# Altium PCB Mopq.PcbDoc (part 2 of 2)
Units mil, origin at the board's own origin, x right, y up, seen from the top; angles counter-clockwise.
Board outline 3099.85 x 1000 mil, 4 copper layers (TOP, SIG, VSS, BOT), stack 31.6 mil thick; 76 components, 92 nets, 477 pads, 380 vias.
Unrouted connection lines stored in the file: 14.
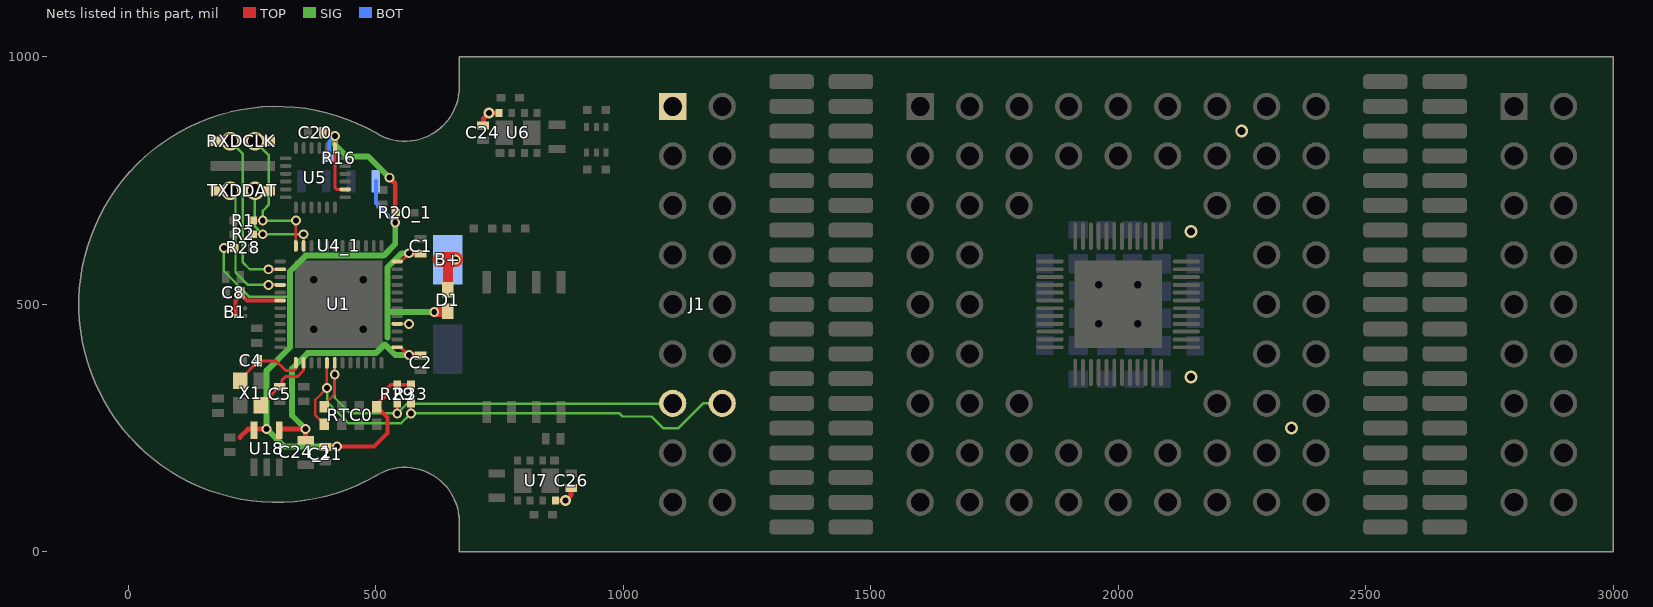
[diagram p4: the nets of this part, all layers, seen from the top]

## Via types
v1: diameter 22, hole 12, TOP to BOT, tented both sides, 144 vias
v2: diameter 20, hole 12, TOP to BOT, 130 vias
v3: diameter 38, hole 28, TOP to BOT, 82 vias
v4: diameter 26, hole 16, TOP to BOT, tented both sides, 16 vias
v5: diameter 22, hole 12, TOP to BOT, 7 vias
v6: diameter 80, hole 65, TOP to BOT, 1 vias

## Nets (pads, with @x,y where several pads share a name; then routed paths per layer and width w, separated by ;. In a path a pad name is that pad's centre, name@x,y a point inside that pad or via, vN(x,y) a via of type N, cw(c..) or ccw(c..) an arc to the next point about the centre after c; other vN are vias at no path point) (continued)
RTC_SCL: J1.13 R29.1 RTC0.8 U1.42 | length 869.7
  TOP w5: RTC0.8@395.67,293.31 395.67,297.24 417.07,318.65 417.07,358.22 v2(417.13,358.27) U1.42@417.13,381.89 ; v2(543.31,279.53) R29.1@543.31,300.2
  SIG w5: v2(417.13,358.27) 417.13,311.22 448.82,279.53 v2(543.31,279.53) 562.99,299.21 1099.21,299.21 J1.13@1100,300
RTC_SDA: J1.14 R33.1 RTC0.1 U1.41 | length 1073.6
  TOP w5: RTC0.1@393.7,255.91 RTC0.1@395.67,257.87 ; U1.41@401.38,381.89 401.38,330.71 377.95,307.28 377.95,275.59 RTC0.1@395.67,257.87 ; RTC0.1@401.57,251.97 RTC0.1@395.67,257.87 ; R33.1@570.87,295.28 v2(570.87,279.53) R33.1@570.87,300.2
  SIG w5: v2(401.57,330.71) 401.57,303.15 444.88,259.84 551.18,259.84 v2(570.87,279.53) 992.13,279.53 998.19,273.46 1057.24,273.46 1080.71,250 1111.42,250 1161.42,300 J1.14@1200,300
RXD: RXD.1 U1.26 | length 336.6
  TOP w5: v2(283.27,570.87) U1.26@306.89,570.87
  SIG w5: v3(205.91,829.53) 231.3,804.13 231.3,584.88 245.32,570.87 v2(283.27,570.87)
  other v2: 283.27,570.87
SCL: 
SCLK: 
STATUS0: 
STATUS1: 
STATUS2: 
SWDCLK: CLK.1 R1.1 U1.24 | length 329.3
  TOP w5: R1.1@250.98,669.29 v2(271.65,669.29) ; U1.24@338.39,618.11 v2(338.39,669.29)
  SIG w5: v3(255.91,829.53) 283.46,801.97 283.46,700.79 271.65,688.98 v2(271.65,669.29) v2(338.39,669.29) ; 271.18,730 281.18,720
SWDIO: DAT.1 R2.1 U1.23 | length 221.1
  TOP w5: R2.1@250.98,641.73 v2(271.65,641.73) ; U1.23@354.13,618.11 v2(354.13,641.73)
  SIG w5: v3(255.91,729.53) 255.91,657.48 v2(271.65,641.73) v2(354.13,641.73)
TERM: 
TXD: TXD.1 U1.28 | length 311.6
  TOP w5: v2(283.27,539.37) U1.28@306.89,539.37
  SIG w5: v3(205.91,729.53) 216.54,718.9 216.54,564.65 241.81,539.37 ; 241.81,539.37 v2(283.27,539.37) 241.81,539.37
  other v2: 283.27,539.37
VDD_EN: 
VDD_PA: B1.A2 C8.2 U1.30 | length 130.3
  TOP w5.91: C8.2@226.3,517.83 C8.2@230,517.83
  TOP w8: B1.A2@216.34,476.38 216.34,507.87 C8.2@226.3,517.83 ; C8.2@230,517.83 239.96,507.87 291.14,507.87 U1.30@306.89,507.87
VIBE_EN: U1.4 | length 23.6
  TOP w5: U1.4@543.11,460.63 v2(566.73,460.63)
VIMU: C20.2 C21.2 R16.2 R20_1.1 R28.2 R29.2 R33.2 RTC0.5 U4_1.8 U5.8 U5.13 U18.5 | length 1890.5
  TOP w5: v2(192.91,614.17) R28.2@213.58,614.17
  TOP w6: C20.2@392.72,850.38 406.99,850.38 v2(417.32,840.05) U5.13@417.32,815.94 417.32,736.22 421.26,732.28 U5.8@437.99,732.28
  TOP w8: v2(421.26,212.6) 496.06,212.6 523.62,240.16 523.62,271.65 RTC0.5@505.91,289.37 ; RTC0.5@505.91,301.18 523.62,318.9 523.62,330.71 530.51,337.6 R33.2@570.87,337.6
  TOP w10: 225.39,231.3 242.13,248.03 v2(279.53,248.03) ; C21.2@400.59,212.6 v2(421.26,212.6) ; v2(527.56,755.91) 539.37,744.09 v2(539.37,665.35)
  SIG w5: v2(192.91,614.17) 192.91,566.93 244.09,515.75 326.77,515.75
  SIG w12: v2(417.32,840.05) 417.32,822.83 440.94,799.21 484.25,799.21 v2(527.56,755.91) ; v2(421.26,212.6) 314.96,212.6 v2(279.53,248.03) 279.53,366.14 326.77,413.39 326.77,566.93 358.27,598.43 515.75,598.43 539.37,622.05 v2(539.37,665.35)
  BOT w8: R16.2@406.5,795.28 406.5,829.22 v2(417.32,840.05) ; U4_1.8@500,749.02 500,704.72 v2(539.37,665.35)
VMCU: C1.2 C2.2 C24_1.2 C26.2 D1.2 J1.1 U1.1 U1.12 U7.8 U18.4 | length 944.2
  TOP w5: U1.1@543.11,413.39 U1.1@550,413.39 ; U1.12@543.11,586.61 U1.12@550.98,586.61
  TOP w6: U1.1@550,413.39 v2@566.73,396.65 ; U1.12@550.98,586.61 v2@566.73,602.36
  TOP w8: v2@566.73,602.36 C1.2@590.35,602.36
  TOP w10: U18.4@305.12,248.03 v2(358.27,248.03) C24_1.2@358.27,225.39 ; v2(566.73,397.64) C2.2@590.35,397.64 ; U7.8@862.95,103.54 v5(883.23,103.54) 894.65,114.96 C26.2@894.65,129.21
  TOP w20: v2(618.11,484.25) D1.2@645.67,484.25
  SIG w12: v2(358.27,248.03) 330.71,275.59 330.71,370.08 362.2,401.57 500.2,401.57 517.82,419.19 539.37,397.64 v2(566.73,397.64) ; 523.62,432.87 523.62,574.8 552.17,603.35 v2(566.73,603.35) ; 531.5,484.25 v2(618.11,484.25)
  other v4: 2147.05,647.24 2249.61,850
VSYS: B+.1 C24.2 D1.1 U6.8 | length 143.2
  TOP w10: C24.2@717.32,861.14 717.32,875.39 v5(728.74,886.81) U6.8@749.02,886.81
  TOP w20: D1.1@645.67,529.53 645.67,590.55
  TOP w30: v2(629.92,590.55) v2(661.42,590.55)
  other v4: 2350,250.39 2147.05,352.95
XC1: C4.2 U1.37 X1.1 | length 153.2
  TOP w5: X1.1@226.42,345.47 X1.1@226.42,349.41 ; C4.2@261.85,384.84 C4.2@261.85,385.83
  TOP w6: X1.1@226.42,349.41 C4.2@261.85,384.84 ; C4.2@261.85,385.83 298.27,385.83 317.95,366.14 334.45,366.14 338.39,370.08 U1.37@338.39,381.89
XC2: C5.2 U1.38 X1.3 | length 136.9
  TOP w6: X1.3@267.76,296.26 301.22,329.72 C5.2@301.22,333.66 ; C5.2@305.16,333.66 310.08,333.66 310.08,346.46 317.95,354.33 342.32,354.33 354.13,366.14 U1.38@354.13,381.89
pads on no net: J3.1 J3.2 J3.3 J3.4 J3.5 J3.6 J3.7 J3.8 J3.9 J3.10 J3.11 J3.12 J3.13 J3.14 J3.15 J3.16 J3.17 J3.18 P1.1 P1.2 P1.3 P1.4 P1.5 P1.6 P1.7 P1.8 P1.9 P1.10 P1.11 P1.12 P1.13 P1.14 P1.15 P1.16 P1.17 P1.18 P1.19 P1.20 P2.1 P2.2 P2.3 P2.4 P2.5 P2.6 P2.7 P2.8 P2.9 P2.10 P2.11 P2.12 P2.13 P2.14 P2.15 P2.16 P2.17 P2.18 P2.19 P2.20 P3.1 P3.2 P3.3 P3.4 P3.5 P3.6 P3.7 P3.8 P3.9 P3.10 P3.11 P3.12 P3.13 P3.14 P3.15 P3.16 P3.17 P3.18 P3.19 P3.20 P4.1 P4.2 P4.3 P4.4 P4.5 P4.6 P4.7 P4.8 P4.9 P4.10 P4.11 P4.12 P4.13 P4.14 P4.15 P4.16 P4.17 P4.18 P4.19 P4.20 RTC0.4 RTC0.7 U5.1 U5.2 U5.3 U5.4 U5.5 U5.6 U5.14 U5.15 U5.16 U5.17 U5.19 U6.3 U6.7 U7.3 U7.7 U10.A1 U10.A3 U10.A4 U10.A5 U10.A6 U10.A7 U10.A9 U10.B2 U10.B3 U10.B4 U10.B5 U10.B6 U10.B7 U10.B8 U10.C1 U10.C2 U10.C3 U10.C7 U10.C8 U10.C9 U10.D1 U10.D2 U10.D8 U10.D9 U10.E1 U10.E2 U10.E8 U10.E9 U10.F1 U10.F2 U10.F8 U10.F9 U10.G1 U10.G2 U10.G3 U10.G7 U10.G8 U10.G9 U10.H2 U10.H3 U10.H4 U10.H5 U10.H6 U10.H7 U10.H8 U10.J1 U10.J3 U10.J4 U10.J5 U10.J6 U10.J7 U10.J9 U11.1 U11.2 U11.3 U11.4 U11.5 U11.6 U11.7 U11.8 U11.9 U11.10 U11.11 U11.12 U11.13 U11.14 U11.15 U11.16 U11.17 U11.18 U11.19 U11.20 U11.21 U11.22 U11.23 U11.24 U11.25 U11.26 U11.27 U11.28 U11.29 U11.30 U11.31 U11.32 U11.33 U11.34 U11.35 U11.36 U11.37 U11.38 U11.39 U11.40 U11.41 U11.42 U11.43 U11.44 U11.45 U11.46 U11.47 U11.48 U18.3 X1.2 X1.4 Z1.1 Z1.2 Z2.1 Z2.2 Z3.1 Z3.2 Z4.1 Z4.2 Z5.1 Z5.2 Z6.1 Z6.2 Z7.1 Z7.2 Z8.1 Z8.2 Z9.1 Z9.2 Z10.1 Z10.2 Z11.1 Z11.2 Z12.1 Z12.2 Z13.1 Z13.2 Z14.1 Z14.2 Z15.1 Z15.2 Z16.1 Z16.2
copper on no net: | length 14928.8
  TOP w6: 1743.7,423.82 v1(1790.95,423.82) ; 1743.7,463.19 v1(1790.95,463.19) ; 1743.7,537.99 v1(1790.95,537.99) ; 1747.64,577.36 v1(1790.95,577.36) ; v1(1755.51,404.13) 1797,404.13 1801.7,408.83 1822,429.13 1862.2,429.13 ; v1(1755.51,443.5) 1800.59,443.5 1817.72,460.63 1862.2,460.63 ; v1@1755.46,556.5 1800.79,556.5 1817.91,539.37 1862.2,539.37 ; v1@1755.46,595.87 1797.9,595.87 1822.9,570.87 1862.2,570.87 ; v1(1755.51,482.87) 1788.78,482.87 1798.03,492.13 1862.2,492.13 ; v1(1755.51,518.31) 1789.76,518.31 1800.2,507.87 1862.2,507.87 ; v1(1790.95,384.45) 1794.69,384.45 1823.62,413.39 1862.2,413.39 ; v1(1790.95,423.82) 1798.62,423.82 1819.69,444.88 1862.2,444.88 ; v1(1790.95,463.19) 1804.09,476.38 1862.2,476.38 ; v1@1790.9,536.81 1804.09,523.62 1862.2,523.62 ; v1@1790.9,576.18 1797.83,576.18 1818.9,555.12 1862.2,555.12 ; v1@1790.9,615.55 1794.88,615.55 1823.82,586.61 1862.2,586.61 ; v1@1884.45,290.95 1884.45,294.09 1913.39,323.03 1913.39,362.2 ; v1(1884.45,709.06) 1884.45,705.12 1913.39,676.18 1913.39,637.8 ; v1@1904.13,255.51 1904.13,297.9 1929.13,322.9 1929.13,362.2 ; v1(1904.13,744.49) 1904.13,703 1908.83,698.3 1929.13,678 1929.13,637.8 ; 1923.03,246.26 v1@1923.03,291.53 ; v1@1923.82,290.95 1923.82,298.03 1944.88,319.09 1944.88,362.2 ; 1923.82,756.3 1923.82,702.17 1944.88,681.1 1944.88,637.8 ; v1@1943.5,255.51 1943.5,300 1960.63,317.13 1960.63,362.2 ; v1(1943.5,744.49) 1943.5,699.21 1960.63,682.09 1960.63,637.8 ; 1962.01,245.67 v1(1962.01,290.95) ; v1@1963.19,290.95 1976.38,304.13 1976.38,362.2 ; v1(1963.19,709.06) 1963.19,756.3 ; v1(1963.19,709.06) 1976.38,695.91 1976.38,637.8 ; v1(1981.69,255.51) 1981.69,289.96 1992.13,300.39 1992.13,362.2 ; v1(1982.87,744.49) 1982.87,711.02 1992.13,701.77 1992.13,637.8 ; 2007.87,362.2 2007.87,299.21 2017.13,289.96 v1(2017.13,255.51) ; 2007.87,637.8 2007.87,700.98 2018.31,711.42 v1(2018.31,744.49) ; 2023.62,362.2 2023.62,304.13 v1(2036.81,290.95) 2036.81,245.67 ; 2023.62,637.8 2023.62,695.91 v1@2036.81,709.1 ; v1(2037.99,709.06) 2037.99,756.3 ; 2039.37,362.2 2039.37,317.91 2056.5,300.79 v1(2056.5,255.51) ; 2039.37,637.8 2039.37,682.28 2056.5,699.41 v1@2056.5,744.54 ; 2055.12,362.2 2055.12,319.88 2076.18,298.82 v1(2076.18,290.95) 2076.18,245.67 ; 2055.12,637.8 2055.12,681.3 2076.18,702.36 v1@2076.18,709.1 ; 2070.87,362.2 2070.87,322.05 2091.17,301.75 2095.87,297.05 v1(2095.87,255.51) ; 2070.87,637.8 2070.87,677.1 2095.87,702.11 v1@2095.87,744.54 ; v1(2077.36,709.06) 2077.36,752.36 ; 2086.61,362.2 2086.61,323.82 2115.55,294.88 v1(2115.55,290.95) ; 2086.61,637.8 2086.61,676.38 2115.55,705.32 v1@2115.55,709.1 ; 2137.8,413.39 2177.17,413.39 2206.1,384.45 v1@2209.1,384.45 ; 2137.8,429.13 2177.1,429.13 2202.1,404.13 v1@2244.54,404.13 ; 2137.8,444.88 2181.1,444.88 2202.17,423.82 v1@2209.1,423.82 ; 2137.8,460.63 2182.09,460.63 2199.21,443.5 v1@2244.54,443.5 ; 2137.8,476.38 2195.91,476.38 v1@2209.1,463.19 ; 2137.8,492.13 2200.79,492.13 2211.22,481.69 v1(2244.49,481.69) ; 2137.8,507.87 2202.56,507.87 2211.81,517.13 v1(2244.49,517.13) ; 2137.8,523.62 2195.87,523.62 v1(2209.06,536.81) 2253.09,536.81 ; 2137.8,539.37 2182.87,539.37 2200,556.5 v1(2244.49,556.5) ; 2137.8,555.12 2180.91,555.12 2201.97,576.18 v1(2209.06,576.18) 2253.09,576.18 ; 2137.8,570.87 2177.95,570.87 2198.26,591.17 2202.95,595.87 v1(2244.49,595.87) ; 2137.8,586.61 2175.98,586.61 2204.92,615.55 v1(2209.06,615.55) ; v1(2209.06,422.64) 2252.36,422.64 ; v1(2209.06,462.01) 2256.3,462.01
  TOP w8: 1600,400 1600,401.73 ; 1600,598.28 1600,600 ; 1900,100 1901.73,100 ; 1900,900 1901.73,900 ; 2098.28,100 2100,100 ; 2098.28,900 2100,900 ; 2400,400 2400,401.73 ; 2400,598.28 2400,600
  TOP w10: 1600,100 1648.91,148.91 1648.91,227.63 1671.91,250.63 1717.91,250.63 1755.51,288.24 1755.51,349.02 v1(1790.95,384.45) ; 1600,300 1650.91,350.91 1650.91,417.63 1676.78,443.5 v1(1755.51,443.5) ; 1600,401.73 1656.91,458.63 1723.39,458.63 1727.95,463.19 1743.7,463.19 ; 1600,598.28 1656.91,541.37 1720.64,541.37 1724.02,537.99 1743.7,537.99 ; 1600,700 1650.91,649.1 1650.91,582.37 1675.6,557.68 v1(1755.51,557.68) ; 1600,900 1648.91,851.1 1727.63,851.1 1750.63,828.1 1750.63,782.1 1787.06,745.67 1847.84,745.67 v1(1884.45,709.06) ; 1700,200 1754.53,254.53 1846.85,254.53 v1(1883.27,290.95) ; 1700,300 1739.76,339.76 1739.76,388.39 v1(1755.51,404.13) ; 1700,400 1723.82,423.82 1743.7,423.82 ; 1700,500 1738.39,500 v1(1755.51,482.87) ; 1700,600 1702.17,600 1724.8,577.36 1746.91,577.36 ; 1700,700 1737.5,662.5 1737.5,615.06 v1(1755.51,597.05) ; 1700,800 1753.54,746.46 1753.54,654.13 v1(1790.95,616.73) ; 1800,100 1850.91,150.91 1917.63,150.91 1942.32,175.6 v1@1942.32,258.3 ; 1800,200 1838.78,238.78 1886.22,238.78 v1(1902.95,255.51) ; 1800,800 1837.5,762.5 1886.12,762.5 v1(1904.13,744.49) ; 1800,900 1850.91,849.1 1917.63,849.1 1943.63,823.1 v1@1943.63,743.58 ; 1900,200 1900,202.36 1922.64,225 1922.64,245.5 ; 1900,800 1900,799.8 1923.82,775.99 1923.82,753.09 ; 1901.73,100 1959.49,157.76 1959.49,224.45 1962.01,226.97 1962.01,245.67 ; 1901.73,900 1958.63,843.1 1958.63,780.54 1963.19,775.99 1963.19,756.3 ; v1(1982.87,744.49) 2000,761.62 2000,800 ; 2000,229.92 2000,238.39 v1(2017.13,255.51) ; 2036.81,246.91 2036.81,219.72 2039.76,216.76 2039.76,158.51 2098.28,100 ; 2037.99,753.09 2037.99,769.93 2042.72,774.65 2042.72,844.44 2098.28,900 ; v1(2056.5,255.51) 2056.5,176.78 2082.37,150.91 2149.1,150.91 2200,100 ; v1(2057.68,744.49) v1(2057.68,744.49) 2057.72,824.44 2058.66,825.39 ; v1@2058.66,742.72 2058.66,825.39 ; 2076.18,245.67 2076.18,224.02 2100,200.2 2100,200 ; 2077.36,753.09 2077.36,775.39 2100,798.03 2100,800 ; v1(2095.87,255.51) 2112.6,238.78 2161.22,238.78 2200,200 ; v1(2097.05,744.49) 2115.06,762.5 2162.5,762.5 2200,800 ; v1(2115.55,290.95) 2150.98,255.51 2211.76,255.51 2249.37,217.91 2249.37,171.91 2272.37,148.91 2351.1,148.91 2400,100 ; v1(2116.73,709.06) 2153.35,745.67 2245.67,745.67 2300,800 ; 2200,900 2149.1,849.1 2082.37,849.1 2058.66,825.39 ; v1(2209.06,383.27) 2243.7,348.62 2243.7,256.3 2300,200 ; v1(2209.06,615.55) 2211.02,615.55 2243.7,648.23 2243.7,707.28 2285.79,749.37 2325.16,749.37 2351.1,775.31 2351.1,851.1 2400,900 ; v1@2243.7,443.5 2323.22,443.5 2349.1,417.63 2349.1,350.91 2400,300 ; v1@2243.7,557.68 2324.4,557.68 2349.1,582.37 2349.1,649.1 2400,700 ; v1(2244.49,402.95) 2262.11,385.34 2262.5,385.34 2262.5,337.5 2300,300 ; v1(2244.49,517.13) 2261.62,500 2300,500 ; v1(2244.49,595.87) 2244.49,596.06 2260.24,611.81 2260.24,660.24 2300,700 ; 2253.09,536.81 2266.14,536.81 2270.7,541.37 2343.1,541.37 2400,598.28 ; 2253.09,576.18 2275.79,576.18 2299.61,600 2300,600 ; 2254.5,422.64 2275.2,422.64 2297.84,400 2300,400 ; 2256.3,462.01 2268.5,462.01 2271.88,458.63 2343.1,458.63 2400,401.73
  SIG w10: 1600,500 1651.77,551.77 1722.05,551.77 v1(1755.51,518.31) ; v1@1981.3,255.91 v1@1983.86,258.47 ; v1(1981.69,255.51) 1949.21,223.03 1949.21,150.79 1992.86,107.14 ; 1992.86,907.14 2050.59,849.41 2050.59,776.77 v1(2018.31,744.49) ; v1@2019.29,742.72 v1@2019.69,743.11 ; v1@2243.7,482.87 v1@2244.69,481.89 ; v1(2244.49,481.69) 2277.76,448.43 2348.43,448.43 2400,500
  BOT w8: 1917.06,473.36 1949.14,473.36 1961.87,460.63 ; 1918.06,527.17 1949.67,527.17 1961.87,539.37 ; 1918.54,582.17 1961.34,539.37 1961.87,539.37 ; 1919.07,417.3 1961.87,460.1 1961.87,460.63 ; 1974.07,416.83 1974.07,448.43 1961.87,460.63 ; 1974.6,584.18 1974.6,552.1 1961.87,539.37 ; 2027.88,415.82 2027.88,447.9 2040.61,460.63 ; 2028.41,583.18 2028.41,551.57 2040.61,539.37 ; 2083.41,582.71 2040.61,539.91 2040.61,539.37 ; 2083.94,417.83 2041.14,460.63 2040.61,460.63 ; 2084.42,472.83 2052.81,472.83 2040.61,460.63 ; 2085.42,526.64 2053.34,526.64 2040.61,539.37
  BOT w12: 1851.61,582.17 1851.77,582.34 1851.77,647.24 1916.2,647.24 1919.6,650.64 ; 1853.74,417.86 1853.74,352.95 1918.17,352.95 ; 2082.62,352.95 2147.05,352.95 2147.05,417.86 ; 2082.62,647.24 2147.05,647.24 2147.05,582.34
  other v1: 1942.32,255.51 1922.64,290.95 2244.49,442.32 1923.82,709.06
  other v3: 1425,50 2575,50 1375,100 1425,100 2575,100 2625,100 1375,150 1425,150 2575,150 2625,150 1425,200 2575,200 1375,250 1425,250 2575,250 2625,250 1375,300 1425,300 2575,300 2625,300 1425,350 2575,350 1375,400 1425,400 2575,400 2625,400 1375,450 1425,450 2575,450 2625,450 1425,500 2575,500 1375,550 1425,550 2575,550 2625,550 1375,600 1425,600 2575,600 2625,600 1425,650 2575,650 1375,700 1425,700 2575,700 2625,700 1375,750 1425,750 2575,750 2625,750 1425,800 2575,800 1375,850 1425,850 2575,850 2625,850 1375,900 1425,900 2575,900 2625,900 1425,950 2575,950
  other v4: 2145.08,317.52 2181.5,353.94

## Polygon pours and split planes (outlines as drawn)
no net on BOT "Bottom-Power" (solid, shelved, pour order 7): 2649.04,4000 1425.96,4000 1375,3950 1375,2700 1425.96,2650 2649.04,2650 2700,2700 2700,3950 2649.04,4000
no net on TOP "Top-Shield" (solid, shelved, pour order 12): 0,3950 0,50 50,0 2650,0 2700,50 2700,3950 2650,4000 50,4000 0,3950
VMCU on SIG "Bottom-GND" (solid, pour order 17): 2000.6,949.16 1999.12,947.68 1999.12,499.76 2449.19,499.76 2450.2,498.75 2450.4,498.95 2450.4,949.34 2000.78,949.34 2000.6,949.16
1V8 on SIG "Bottom-GND" (solid, pour order 12): 1551.63,949.21 1550.45,948.03 1550.45,499.4 2004.42,499.4 2004.78,499.04 2000.84,502.98 2000.84,948.8 1552.04,948.8 1551.63,949.21
3V3 on SIG "Bottom-GND" (solid, pour order 15): 1550,500 1551.18,498.82 1551.18,49.8 1999.8,49.8 2000,50 1998.91,51.09 1998.91,499.61 1550,499.61
VSYS on SIG "Bottom-GND" (solid, pour order 16): 1997.63,49.8 1998.25,49.18 2450.2,49.18 2450.2,498.39 2450,498.59 2448.98,499.61 1998.91,499.61 1998.91,50.49 1998.43,50
GND on SIG "Top-Shield" (solid, pour order 4): 135,270 145,260 190,260 230,300 230,395 280,440 305,440 315,450 315,495 305,505 240,505 180,565 115,565 105,555 105,480 115,395 135,330
VMCU on SIG "Top-Shield" (solid, pour order 6): 340.2,410 365.2,385 515.2,385 540.2,410 540.2,565 515.2,590 370.2,590 340.2,560
GND on VSS (split plane): 156 vertices, not listed, extent 100,20.1 2979.9,979.9

## Other copper
TOP:
  text "1" at 3100,50 h60 r90
  text "1" at 2716.54,18.58 h60 r90
SIG:
  text "2" at 3100,125 h60 r90
BOT:
  text "4" at 3100,325 h60 r90
VSS (plane layer: these items are gaps in the copper):
  region: 3125,293.7 3125,400 2995,400 2995,293.7
  region: 3130,25 3130,200 3000,200 3000,25
  lines w40: -60,330 -60,670 ; -25,275 -25,730 ; 10,230 10,770 ; 45,195 45,805 ; 78.9,580 78.9,829.58 ; 80,169.62 80,425 ; 111.36,151.77 111.36,322.15 cw(c600,500) 111.36,677.85 111.36,848.23
  text "3" at 3100,225 h60 r90

## Silkscreen, mask and mechanical layers (free items; w line width, h text height)
Top Solder:
  circle w8: c1884.45,709.06 r4
  circle w8: c1904.13,744.49 r4
  circle w8: c1923.82,709.06 r4
  circle w8: c1943.5,744.49 r4
  circle w8: c1963.19,709.06 r4
  circle w8: c1982.87,744.49 r4
  circle w8: c2018.31,744.49 r4
  circle w8: c2037.99,709.06 r4
  circle w8: c2057.68,744.49 r4
  circle w8: c2077.36,709.06 r4
  circle w8: c2097.05,744.49 r4
  circle w8: c2116.73,709.06 r4
  circle w8: c2209.06,615.55 r4
  circle w8: c2244.49,595.87 r4
  circle w8: c2209.06,576.18 r4
  circle w8: c2244.49,556.5 r4
  circle w8: c2209.06,536.81 r4
  circle w8: c2244.49,517.13 r4
  circle w8: c2244.49,481.69 r4
  circle w8: c2209.06,462.01 r4
  circle w8: c2244.49,442.32 r4
  circle w8: c2209.06,422.64 r4
  circle w8: c2244.49,402.95 r4
  circle w8: c2209.06,383.27 r4
  circle w8: c2115.55,290.95 r4
  circle w8: c2095.87,255.51 r4
  circle w8: c2076.18,290.95 r4
  circle w8: c2056.5,255.51 r4
  circle w8: c2036.81,290.95 r4
  circle w8: c2017.13,255.51 r4
  circle w8: c1981.69,255.51 r4
  circle w8: c1962.01,290.95 r4
  circle w8: c1942.32,255.51 r4
  circle w8: c1922.64,290.95 r4
  circle w8: c1902.95,255.51 r4
  circle w8: c1883.27,290.95 r4
  circle w10: c2048.62,949.47 r6
  circle w10: c2149.02,949.47 r6
  circle w10: c2250.4,949.47 r6
  circle w10: c2348.82,949.47 r6
  circle w10: c1649.02,949.47 r6
  circle w10: c1749.41,949.47 r6
  circle w10: c1850.79,949.47 r6
  circle w10: c1949.21,949.47 r6
  circle w10: c1949.21,48.89 r6
  circle w10: c1848.82,48.89 r6
  circle w10: c1747.44,48.89 r6
  circle w10: c1649.02,48.89 r6
  circle w10: c2349.02,48.89 r6
  circle w10: c2248.62,48.89 r6
  circle w10: c2147.24,48.89 r6
  circle w10: c2048.82,48.89 r6
  circle w10: c1551.47,949.41 r6
  circle w10: c1551.47,849.02 r6
  circle w10: c1551.47,747.64 r6
  circle w10: c1551.47,649.21 r6
  circle w10: c1551.28,549.8 r6
  circle w10: c1550.89,49.8 r6
  circle w10: c1550.89,150.2 r6
  circle w10: c1550.89,251.58 r6
  circle w10: c1550.89,350 r6
  circle w10: c1551.09,449.41 r6
  circle w10: c2450.89,49.18 r6
  circle w10: c2450.89,149.58 r6
  circle w10: c2450.89,250.95 r6
  circle w10: c2450.89,349.38 r6
  circle w10: c2451.09,448.79 r6
  circle w10: c2449.91,549.58 r6
  circle w10: c2449.91,649.97 r6
  circle w10: c2449.91,751.35 r6
  circle w10: c2449.91,849.77 r6
  circle w10: c2450.1,949.18 r6
  circle w12: c1649.84,749.61 r6
  circle w12: c2249.45,850 r6
  circle w12: c2349.84,250.39 r6
  circle w12: c1750.24,150 r6
  circle w8: c1790.95,384.45 r4
  circle w8: c1755.51,404.13 r4
  circle w8: c1790.95,423.82 r4
  circle w8: c1755.51,443.5 r4
  circle w8: c1790.95,463.19 r4
  circle w8: c1755.51,482.87 r4
  circle w8: c1755.51,518.31 r4
  circle w8: c1790.95,537.99 r4
  circle w8: c1755.51,557.68 r4
  circle w8: c1790.95,577.36 r4
  circle w8: c1755.51,597.05 r4
  circle w8: c1790.95,616.73 r4
  circle w12: c1817.32,646.26 r6
  circle w12: c1850.63,647.05 r6
  circle w12: c1854.76,682.68 r6
  circle w12: c2145.13,680.71 r6
  circle w12: c2146.89,649.21 r6
  circle w12: c2182.52,645.08 r6
  circle w12: c2180.5,353.94 r6
  circle w12: c2149.06,352.95 r6
  circle w12: c2144.92,317.32 r6
  circle w12: c1817.17,354.92 r6
  circle w12: c1853.74,318.5 r6
  circle w12: c1852.35,352.51 r6
Bottom Solder:
  circle w8: c2116.73,709.06 r4
  circle w8: c2097.05,744.49 r4
  circle w8: c2077.36,709.06 r4
  circle w8: c2057.68,744.49 r4
  circle w8: c2037.99,709.06 r4
  circle w8: c2018.31,744.49 r4
  circle w8: c1982.87,744.49 r4
  circle w8: c1963.19,709.06 r4
  circle w8: c1943.5,744.49 r4
  circle w8: c1923.82,709.06 r4
  circle w8: c1904.13,744.49 r4
  circle w8: c1884.45,709.06 r4
  circle w8: c2209.06,383.27 r4
  circle w8: c2244.49,402.95 r4
  circle w8: c2209.06,422.64 r4
  circle w8: c2244.49,442.32 r4
  circle w8: c2209.06,462.01 r4
  circle w8: c2244.49,481.69 r4
  circle w8: c2244.49,517.13 r4
  circle w8: c2209.06,536.81 r4
  circle w8: c2244.49,556.5 r4
  circle w8: c2209.06,576.18 r4
  circle w8: c2244.49,595.87 r4
  circle w8: c2209.06,615.55 r4
  circle w8: c1883.27,290.95 r4
  circle w8: c1902.95,255.51 r4
  circle w8: c1922.64,290.95 r4
  circle w8: c1942.32,255.51 r4
  circle w8: c1962.01,290.95 r4
  circle w8: c1981.69,255.51 r4
  circle w8: c2017.13,255.51 r4
  circle w8: c2036.81,290.95 r4
  circle w8: c2056.5,255.51 r4
  circle w8: c2076.18,290.95 r4
  circle w8: c2095.87,255.51 r4
  circle w8: c2115.55,290.95 r4
  circle w8: c1790.95,616.73 r4
  circle w8: c1755.51,597.05 r4
  circle w8: c1790.95,577.36 r4
  circle w8: c1755.51,557.68 r4
  circle w8: c1790.95,537.99 r4
  circle w8: c1755.51,518.31 r4
  circle w8: c1755.51,482.87 r4
  circle w8: c1790.95,463.19 r4
  circle w8: c1755.51,443.5 r4
  circle w8: c1790.95,423.82 r4
  circle w8: c1755.51,404.13 r4
  circle w8: c1790.95,384.45 r4
  circle w10: c1551.09,450.2 r6
  circle w10: c1550.89,350.79 r6
  circle w10: c1550.89,252.36 r6
  circle w10: c1550.89,150.99 r6
  circle w10: c1948.23,49.28 r6
  circle w10: c1848.82,49.47 r6
  circle w10: c1750.4,49.47 r6
  circle w10: c1649.02,49.47 r6
  circle w10: c1948.23,949.28 r6
  circle w10: c1848.82,949.47 r6
  circle w10: c1750.4,949.47 r6
  circle w10: c1649.02,949.47 r6
  circle w10: c1551.28,551.77 r6
  circle w10: c1551.47,651.18 r6
  circle w10: c1551.47,749.61 r6
  circle w10: c1551.47,850.98 r6
  circle w10: c2450.09,550.56 r6
  circle w10: c2450.29,649.97 r6
  circle w10: c2450.29,748.39 r6
  circle w10: c2450.29,849.77 r6
  circle w10: c2049.8,949.09 r6
  circle w10: c2149.21,948.89 r6
  circle w10: c2247.64,948.89 r6
  circle w10: c2349.02,948.89 r6
  circle w10: c2049.8,49.09 r6
  circle w10: c2149.21,48.89 r6
  circle w10: c2247.64,48.89 r6
  circle w10: c2349.02,48.89 r6
  circle w10: c2449.91,448.98 r6
  circle w10: c2449.71,349.58 r6
  circle w10: c2449.71,251.15 r6
  circle w10: c2449.71,149.77 r6
  circle w10: c2450.1,49.18 r6
  circle w10: c1551.48,48.82 r6
  circle w10: c1551.09,949.41 r6
  circle w10: c2450.1,949.18 r6
  circle w12: c1750.24,150 r6
  circle w12: c1649.84,749.61 r6
  circle w12: c2249.45,850 r6
  circle w12: c2349.84,250.39 r6
  circle w12: c1817.32,646.26 r6
  circle w12: c1850.79,646.89 r6
  circle w12: c1854.92,682.52 r6
  circle w12: c2146.06,680.71 r6
  circle w12: c2147.05,649.06 r6
  circle w12: c2181.5,645.28 r6
  circle w12: c2181.5,353.94 r6
  circle w12: c2149.06,352.95 r6
  circle w12: c2144.92,317.32 r6
  circle w12: c1853.74,318.5 r6
  circle w12: c1852.35,352.51 r6
  circle w12: c1817.17,354.92 r6
  region: 1919.6,583.71 1921.61,581.7 2088.6,581.7 2088.6,417.17 2087.06,415.64 2085.53,417.17 1918.54,417.17 1918.54,582.17
Mechanical 1:
  lines w10: 500,153.59 cw(c558.65,60.56) 668.62,60.01 ; 500,153.59 cw(c300,500) 500,846.41 ; 500,153.59 cw(c558.65,60.56) 668.62,60.01 ; 500,846.41 ccw(c558.65,939.44) 668.62,939.99 ; 500,846.41 ccw(c558.65,939.44) 668.62,939.99 ; 668.62,60.01 668.62,0 3000,0 3000,1000 668.62,1000 668.62,939.99
Mechanical 13:
  circle w10: c300,500 r400
  circle w10: c775,500 r500
  circle w10: c517.13,503.94 r25
  circle w10: c517.13,503.94 r25
  rectangle: 1050,300 1175,700
  lines w10: -50,275 -50,725 ; -30,500 80,500 ; -10.8,277.69 cw(c600,500) -10.8,722.31 ; -6.22,150 250,225 600,25 400,225 0,225 ; -5.35,148.5 cw(c600,500) -6.22,850 250,775 ; 0,325 100,350 ; 0,675 100,650 ; 0,775 400,775 ; 26.59,98.5 ccw(c600,500) 26.59,901.5 ; 130.15,328.99 cw(c600,500) 130.15,671.01 ; 248.82,774.02 598.82,974.02 398.82,774.02 ; 600,975 950,975 1000,925 1000,75 950,25 ; 1050,25 2800,25 2800,975 1050,975 ; -300,10 ccw(c-190,10) -190,-100 2890,-100 ccw(c2890,10) 3000,10 3000,1990 ccw(c2890,1990) 2890,2100 -190,2100 ccw(c-190,1990) -300,1990 -300,10
Mechanical 15:
  lines w10: 93.11,303.15 -25,303.15 -25,381.89 93.11,381.89 93.11,460.63 -25,460.63 -25,539.37 93.11,539.37 93.11,618.11 -25,618.11 -25,696.85 93.11,696.85
Drill Drawing:
  lines w5: 7140,-710 7140,1790 12890,1790 ; 7156,-710 12890,-710 ; 8015.23,4347.28 10215.23,4347.28 ; 9340,-710 9340,-460 ; 9340,1790 9340,965 ; 10665,15 10665,440 ; 11440,-696 11440,-464 11440,15 11440,440 ; 12879,961 9340,965 ; 12890,-700 12890,1797 ; 12890,-460 9340,-460 ; 12890,15 9340,15 ; 12890,440 9340,440 ; 9340,-460 9340,15 ; 9340,15 9340,440 ; 9340,440 9340,965
  lines w8: 7156,-710 -1435,-710 -1435,8650 12890,8650 12890,1785
  text "FABRICATION NOTES" at 7486,8095 h120
  text "4 LAYER BOARD" at 7481,7866 h120
  text "1. Material to be CEM3, FR4, or MC3 @" at 7502,7626 h85
  text ".062\" +/- .007\" nominal thickness." at 9900,7626 h85
  text "2. Finished copper thickness to" at 7494,7484 h85
  text "be 1 oz." at 9370,7484 h85
  text "requirements for" at 10913,7362 h85
  text "nent side to meet IPC600" at 9325,7355 h85
  text "3. All holes drilled from compo" at 7494,7348 h85
  text "breakout.  Hole size indicates finished diameter" at 7660,7225 h85
  text "4. All tooling hole centers to be within +/- .003\" of center of datum hole" at 7494,7074 h85
  text "All other hole centers to be within +/- .005\" of center datum hole" at 7668,6937 h85
  text "5. Trace width reduction due to etch factor, pits or dents is not to exceed .005\"" at 7494,6792 h85
  text "6. Minimum annular ring to meet" at 7501,6633 h85
  text "IPC600 requirements." at 9492,6626 h85
  text "7. Apply silkscreen using white" at 7501,6460 h85
  text "epoxy ink to component side," at 9347,6460 h85
  text "per artwork provided." at 11163,6460 h85
  text "8. Apply soldermask over bare copper per artwork provided." at 7501,6301 h85
  text "PC401 or SR1000 Green." at 7665,6160 h85
  text "9. Boards must display manufacturers UL company ID (or Trademark) and type" at 7510,6030 h85
  text "designator in copper or white epoxy ink." at 7660,5900 h85
  text "+/-" at 7481.35,4693.22 h85
  text ".XX" at 9323.92,2996.81 h85
  text "ANGLES" at 10313.92,2996.81 h85
  text ".XXX" at 9743.92,2988.81 h85
  text ".LEGEND" at 7625,2950 h100
  text ".005" at 9743.92,2828.81 h85
  text ".01" at 9331.92,2823.81 h85
  text "dimensions are in inches" at 10864.16,2781.72 h85
  text "Tolerances are:" at 10864.16,2631.72 h85
  text "Unless otherwise specified" at 7276,1606 h85
  text "SayHello" at 10725,1600 h120
  text "1660 17th St" at 10525,1400 h120
  text "San Fransciso, CA 94105" at 10253,1239 h120
  text "(415) 000-0000" at 10441,1044 h120
  text "TITLE:" at 9385,826 h85
  text "FABRICATION DRAWING" at 10305,765 h100
  text "CV2 - M43xx-Pro TCP/IP CARD" at 9793,560 h120
  text "B: Add Voltage level shifting" at 7205,531 h90
  text "D:make pin 8 of J2 go to chassis" at 7205,345 h90
  text "DWG NO.:" at 9392,316 h85
  text "REV:" at 10743,316 h85
  text "ECO NO.:" at 11515,316 h85
  text "A" at 11108,140 h120
  text "000-00000" at 9450,130 h120
  text "DRAWN BY:" at 9422,-134 h85
  text "DATE:" at 11530,-134 h85
  text "Dyke Shaffer" at 10234,-289 h120
  text "04.14.14" at 11828,-311 h120
  text "SCALE:" at 9385,-584 h85
  text "SHEET" at 11523,-629 h85
  text "OF" at 12258,-636 h85
  text "1" at 12036,-638 h120
  text "1" at 12519,-638 h120
  text "N/A" at 9869,-648 h120

## Text inside footprints (layer, text, board x,y; h text height)
J1: Top Overlay "1" at 1079,977 h40 r270
J3: Top Overlay "1" at 2779,977 h40 r270